# Altium PCB PCB_NEW-Door-Lock-project-Using-ESP32-copy_2026-03-03.pcbdoc
Units mm, origin at the board's own origin, x right, y up, seen from the top; angles counter-clockwise.
Board outline 107.7 x 128.65 mm, 2 copper layers (Top Layer, Bottom Layer); 29 components, 28 nets, 111 pads, 62 vias.
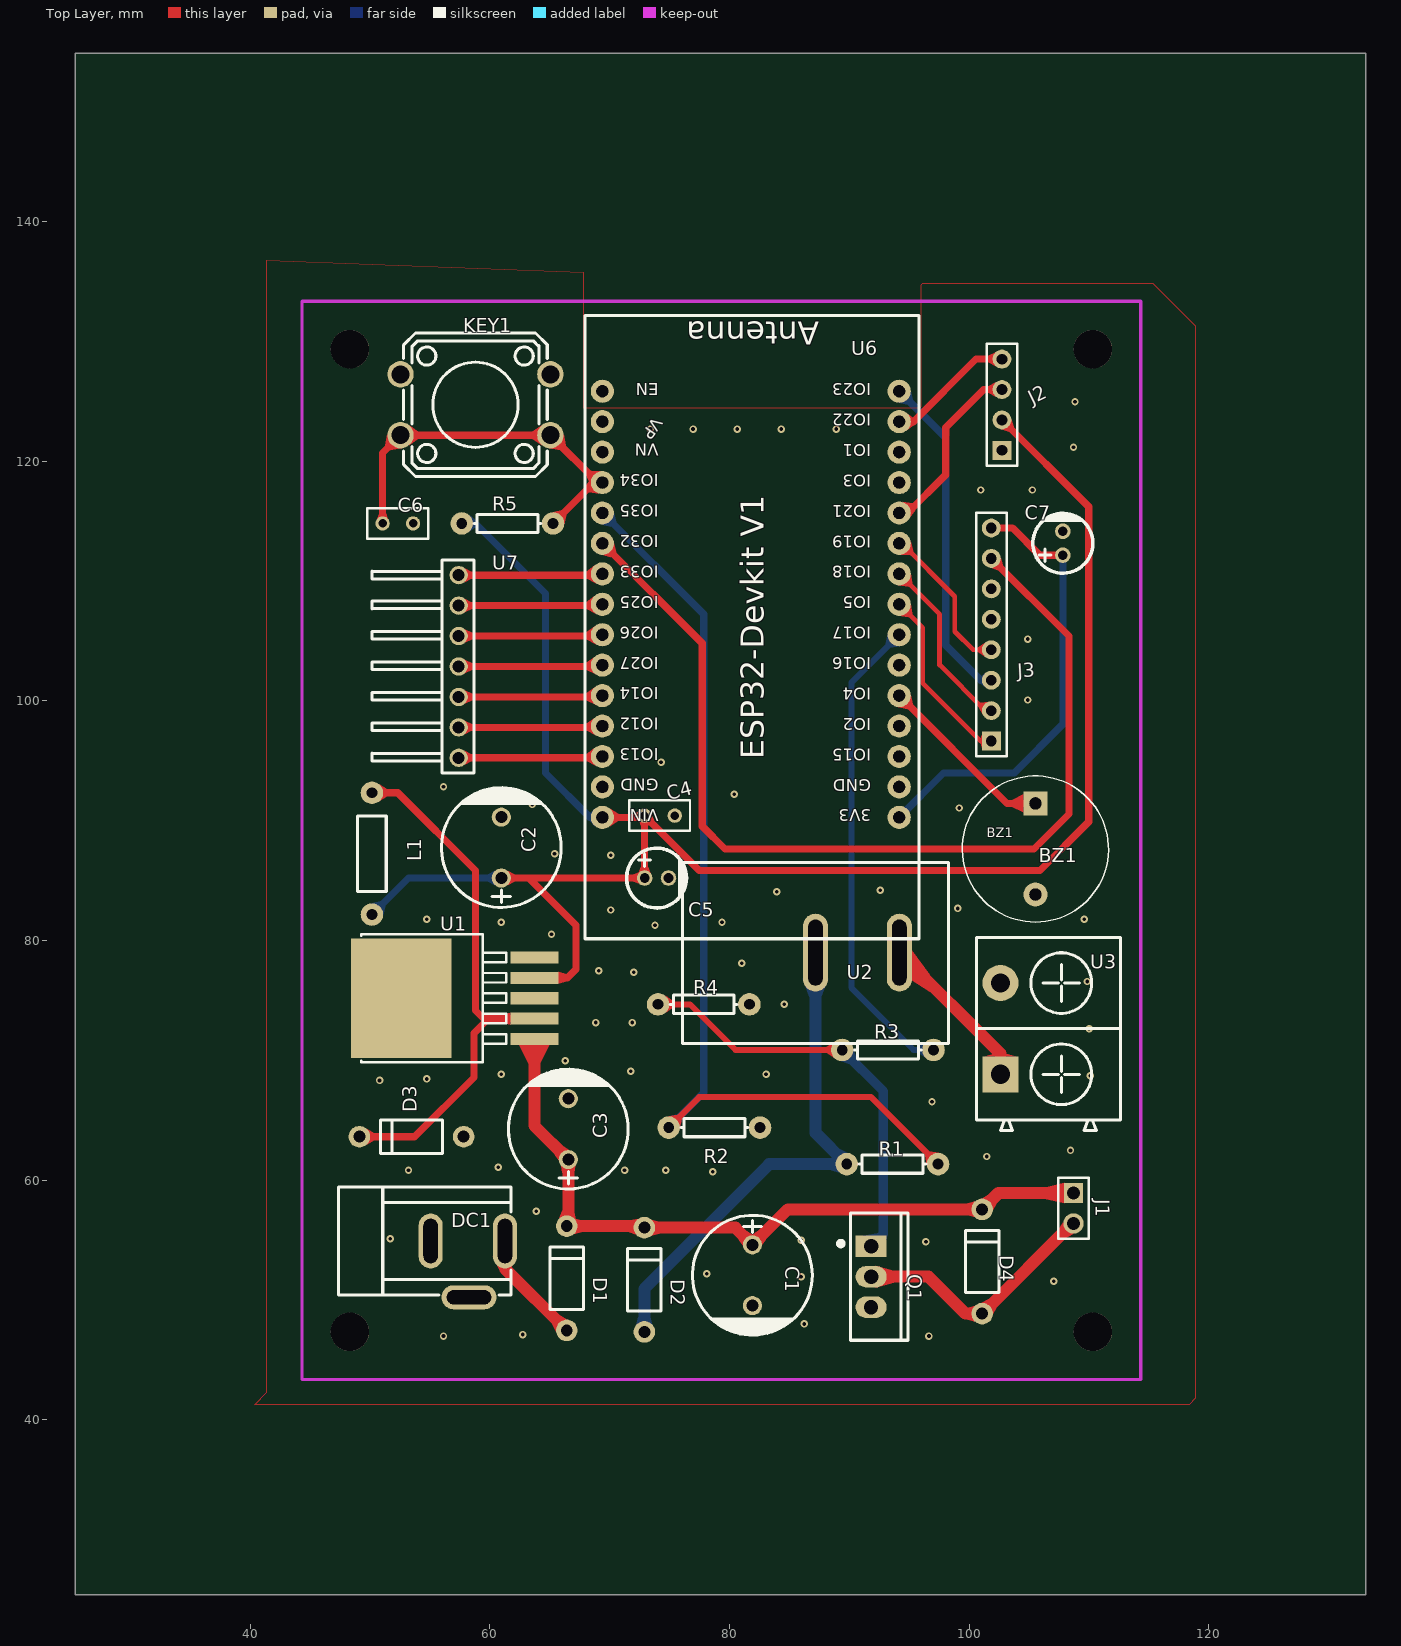
[diagram p0: Top Layer view]
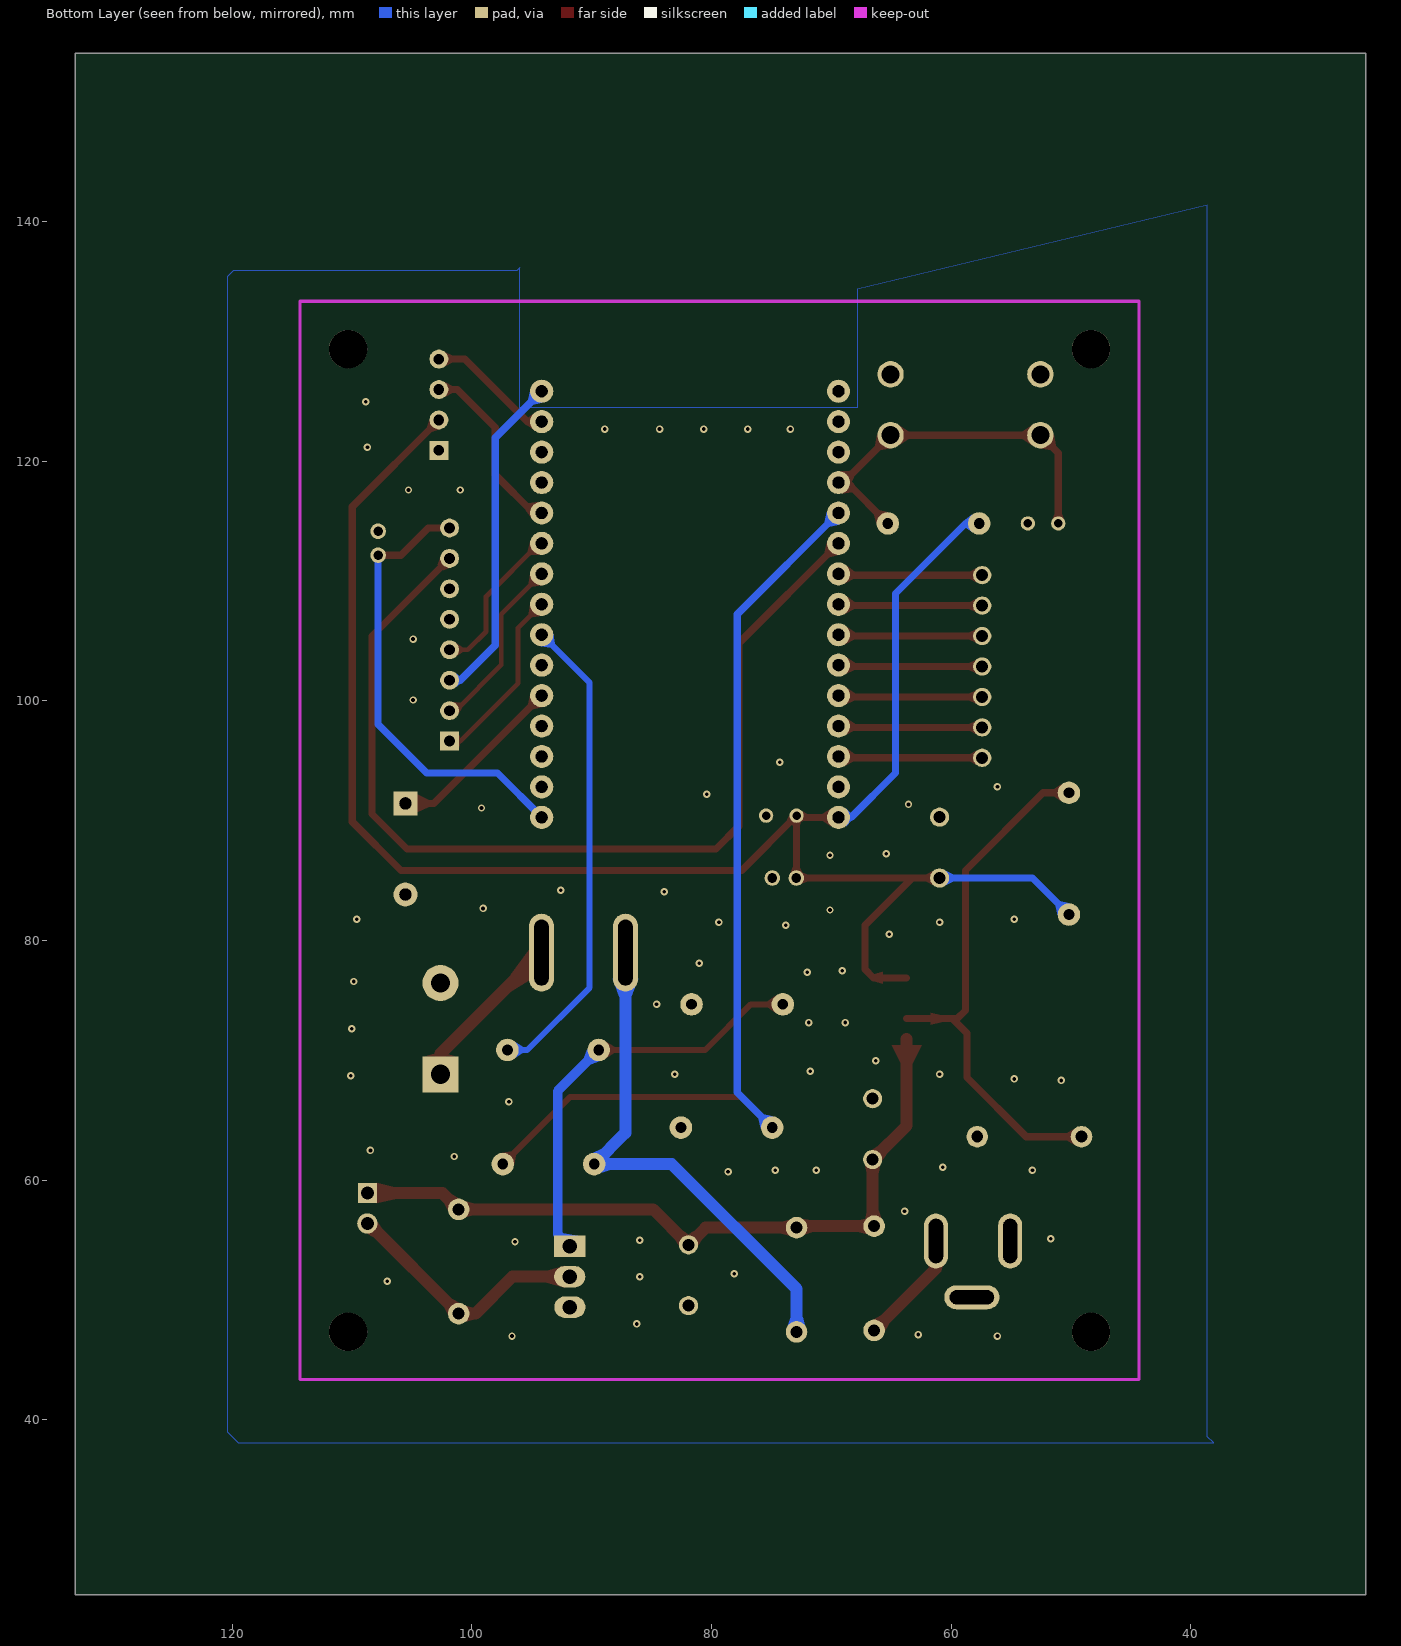
[diagram p1: Bottom Layer view, seen from below]

## Layer stack, top to bottom
Top Layer: signal copper (thickness not stored)
Dielectric: dielectric 0.32, FR-4, Dk 4.8
Bottom Layer: signal copper (thickness not stored)

## Board outline
133.096,25.4 25.4,25.4 25.4,154.051 133.096,154.051

## Components (designator, comment, footprint, x,y, rotation, side; value= is the part's Value field where it differs from the comment)
BZ1 "DEVICE_BUZZER" BUZZER_BEEPER:BUZZER_12X9.5RM7.6 105.537,91.44 r270 top
C1 "1000uF" CAP-TH_BD10.0-P5.00-D1.0-FD 81.915,52.07 r270 top
C2 "220uF" CAP-TH_BD10.0-P5.00-D1.0-FD 60.96,87.757 r90 top
C3 "220uF" CAP-TH_BD10.0-P5.00-D1.0-FD 66.548,64.262 r90 top
C4 "0.1u" RAD-0.1 74.168,90.424 r0 top
C5 "10uF" CAP-TH_BD5.0-P2.00-D0.8-FD-10UF50VC110GL 73.914,85.217 r0 top
C6 "0.1u" RAD-0.1 52.324,114.808 r180 top
C7 "10uF" CAP-TH_BD5.0-P2.00-D0.8-FD-10UF50VC110GL 107.823,113.157 r90 top
D1 "1N5822" DO-41_BD2.4-L4.7-P8.70-D0.9-RD 66.421,51.816 r270 top
D2 "1N5822" DO-41_BD2.4-L4.7-P8.70-D0.9-RD 72.898,51.689 r270 top
D3 "1N5822" DO-41_BD2.4-L4.7-P8.70-D0.9-RD 53.467,63.627 r0 top
D4 "1N5822" DO-41_BD2.4-L4.7-P8.70-D0.9-RD 101.092,53.213 r270 top
DC1 "jack dc" DC-IN-TH_DC005 58.166,52.578 r0 top
J1 "HDR-M-2.54_1x2" HDR-M-2.54_1X2 108.712,57.658 r270 top
J2 "lcd" HDR-M-2.54_1X4 102.743,124.714 r90 top
J3 "rfid" HDR-M-2.54_1X8 101.854,106.807 r90 top
KEY1 "K4-12×12_TH" KEY-TH_4P-L12.0-W12.0-P5.00-LS12.5 58.801,124.714 r180 top
L1 "33uH" L_AXIAL-0.4 50.165,87.249 r270 top
Q1 "IRLZ44NPBF-VB" TO-220-3_L10.0-W4.5-P2.54-L-2 91.821,51.943 r270 top
R1 "10k" R_AXIAL-0.3 93.599,61.341 r0 top
R2 "2.7k" R_AXIAL-0.3 78.74,64.389 r0 top
R3 "470" R_AXIAL-0.3 93.218,70.866 r180 top
R4 "10k" R_AXIAL-0.3 77.851,74.676 r0 top
R5 "10k" R_AXIAL-0.3 61.468,114.808 r0 top
U1 "LM2596SX-5.0-JSM" TO-263-5_L10.0-W8.4-P1.70-LS15.3-BR 58.166,75.184 r0 top
U2 "HX KCD1-2P-P" SW-TH_L22.2-W15.0-P7.00_KCD1-2P-P 90.678,78.994 r180 top
U3 "KF7.62-2P_C5173665" CONN-TH_2P-P7.62_KEFA_KF7.62-2P 102.616,72.644 r90 top
U6 "ESP32-DEVKIT-V1-30PIN" ESP32-DEVKITV1_ESP32-DEVKITV1 88.9,108.712 r0 top
U7 "keypad" CONN-TH_PZ2.54-1X7P-ZW 57.404,102.87 r270 top

## Footprints (in the part's own frame and the unit in brackets; to place one, negate y for a bottom-side part, rotate by r counter-clockwise, add the part's x,y. Pads: shape width x height; smd on the part's side, far side on the other; paste and mask are expansions set on the pad)
BUZZER_BEEPER:BUZZER_12X9.5RM7.6 [mm]
  rect 2x2 hole 1 slot 1.005 at 0 deg paste+0 mask+0.051: 1(0,0)
  round 2 hole 1 slot 1.005 at 0 deg paste+0 mask+0.051: 2(7.6,0)
  silkscreen extent -2.3,-6.1 9.9,6.1
CAP-TH_BD5.0-P2.00-D0.8-FD-10UF50VC110GL [mm]
  round 1.3 hole 0.8 paste+0 mask+0.051: 1(-1,0) 2(1,0)
  silkscreen extent -2.5,-2.5 2.5,2.5
CAP-TH_BD10.0-P5.00-D1.0-FD [mm]
  round 1.6 hole 1 paste+0 mask+0.051: 1(-2.54,0) 2(2.54,0)
  silkscreen extent -5,-5 5.08,5
CONN-TH_2P-P7.62_KEFA_KF7.62-2P [mm]
  rect 3x3 hole 1.6 paste+0 mask+0.051: 1(-3.81,0)
  round 3 hole 1.6 paste+0 mask+0.051: 2(3.81,0)
  silkscreen extent -8.51,-10 7.62,2
CONN-TH_PZ2.54-1X7P-ZW [mil]
  round 60 hole 39.37 paste+0 mask+1.97: 1(-300,0) 2(-200,0) 3(-100,0) 4(0,0) 5(100,0) 6(200,0) 7(300,0)
  silkscreen extent -350,-285 350,50
DC-IN-TH_DC005 [mm]
  oval 2x4.6 hole 1.2 slot 3.7 at 90 deg paste+0 mask+0.051: 1(3.1,2.35) 2(-3.1,2.35)
  oval 4.6x2 hole 1.2 slot 3.7 at 0 deg paste+0 mask+0.051: 3(0.1,-2.35)
  silkscreen extent -10.8,-2.15 3.6,6.85
DO-41_BD2.4-L4.7-P8.70-D0.9-RD [mm]
  round 1.8 hole 1 paste+0 mask+0.051: 1(-4.35,0) 2(4.35,0)
  silkscreen extent -2.6,-1.4 2.6,1.4
ESP32-DEVKITV1_ESP32-DEVKITV1 [mil]
  round 76 hole 39.36 paste+0 mask+2: 3V3(207.32,-725.64) D2(207.32,-425.64) D4(207.32,-325.64) D5(207.32,-25.64) D12(-767.89,-425.64) D13(-767.89,-525.64) D14(-767.89,-325.64) D15(207.32,-525.64) D18(207.32,74.36) D19(207.32,174.36) D21(207.32,274.36) D22(207.32,574.36) D23(207.32,674.36) D25(-767.89,-25.64) D26(-767.89,-125.64) D27(-767.89,-225.64) D32(-767.89,174.36) D33(-767.89,74.36) D34(-767.89,374.36) D35(-767.89,274.36) EN(-767.89,674.36) GND(207.32,-625.64) GND2(-767.89,-625.64) RX0(207.32,374.36) RX2(207.32,-225.64) TX0(207.32,474.36) TX2(207.32,-125.64) VIN(-767.89,-725.64) VN(-767.89,474.36) VP(-767.89,574.36)
  silkscreen extent -826,-1124 273,923
HDR-M-2.54_1X2 [mm]
  rect 1.7x1.575 hole 1.1 paste+0 mask+0.051: 1(-1.27,0)
  round 1.7 hole 1.1 paste+0 mask+0.051: 2(1.27,0)
  silkscreen extent -2.54,-1.27 2.54,1.27
HDR-M-2.54_1X4 [mil]
  rect 62x62 hole 35 paste+0 mask+2: 1(-150,0)
  round 62 hole 35 paste+0 mask+2: 2(-50,0) 3(50,0) 4(150,0)
  silkscreen extent -200,-50 200,50
HDR-M-2.54_1X8 [mil]
  rect 62x62 hole 35 paste+0 mask+2: 1(-400,0)
  round 62 hole 35 paste+0 mask+2: 2(-300,0) 3(-200,0) 4(-100,0) 5(0,0) 6(100,0) 7(200,0) 8(300,0)
  silkscreen extent -450,-50 350,50
KEY-TH_4P-L12.0-W12.0-P5.00-LS12.5 [mm]
  round 2.2 hole 1.5 paste+0 mask+0.051: 1(-6.251,2.54) 2(6.251,2.54) 3(-6.251,-2.54) 4(6.251,-2.54)
  silkscreen extent -5.99,-6 5.99,6
L_AXIAL-0.4 [mil]
  round 74 hole 35.4 paste+0 mask+2: 1(-200,0) 2(200,0)
  silkscreen extent -124,-47 124,47
R_AXIAL-0.3 [mil]
  round 74 hole 35.4 paste+0 mask+2: 1(-150,0) 2(150,0)
  silkscreen extent -110,-30 110,30
RAD-0.1 [mil]
  round 47 hole 28 paste+0 mask+2: 1(-50,0) 2(50,0)
  silkscreen extent -100,-50 100,50
SW-TH_L22.2-W15.0-P7.00_KCD1-2P-P [mm]
  oval 2.1x6.5 hole 1.2 slot 5.5 at 90 deg paste+0 mask+0.051: 1(-3.5,0) 2(3.5,0)
  silkscreen extent -7.6,-7.5 14.6,7.6
TO-220-3_L10.0-W4.5-P2.54-L-2 [mm]
  rect 1.8x2.6 hole 1.2 paste+0 mask+0.051: 1(-2.54,0.005)
  oval 1.8x2.6 hole 1.2 paste+0 mask+0.051: 2(0,0.005) 3(2.54,-0.005)
  silkscreen extent -5.3,-2.73 5.3,3.09
TO-263-5_L10.0-W8.4-P1.70-LS15.3-BR [mm]
  rect 4x1.02 smd paste+0 mask+0.051: 1(5.55,-3.4) 2(5.55,-1.7) 3(5.55,0) 4(5.55,1.7) 5(5.55,3.4)
  rect 8.4x10 smd paste+0 mask+0.051: 6(-5.55,0)
  silkscreen extent -8.91,-5.33 3.2,5.33

## Free pads (board coordinates)
  round 3.2 hole 3.2 unplated paste+0: ""(48.323,47.35) ""(48.323,129.35) ""(110.323,47.35) ""(110.323,129.35)

## Via types
v1: diameter 0.62, hole 0.31, Top Layer to Bottom Layer, tented both sides, 62 vias

## Nets (pads, with @x,y where several pads share a name; then routed paths per layer and width w, separated by ;. In a path a pad name is that pad's centre, name@x,y a point inside that pad or via, vN(x,y) a via of type N, cw(c..) or ccw(c..) an arc to the next point about the centre after c; other vN are vias at no path point)
+3.3V: C7.1 J3.8 U6.3V3 | length 37.9
  Top Layer w0.6: J3.8 103.632,114.427 105.903,112.156 C7.1
  Bottom Layer w0.6: U6.3V3 97.865,93.98 103.759,93.98 107.823,98.044 C7.1
+5V: C2.1 C4.1 C5.1 J2.2 L1.2 R5.1 U1.4 U6.VIN | length 155.9
  Top Layer w0.6: U1.4 66.469,76.883 67.183,77.597 67.183,81.28 63.246,85.217 C2.1 C5.1 72.914,90.408 C4.1 ; U6.VIN 72.755,90.281 C4.1 ; J2.2 109.982,116.205 109.982,89.916 105.918,85.852 77.47,85.852 C4.1
  Bottom Layer w0.6: L1.2 53.213,85.217 C2.1 ; R5.1 58.801,114.808 64.643,108.966 64.643,93.98 68.341,90.282 U6.VIN
+12V: C1.1 C3.1 D1.1 D2.1 D4.1 J1.1 U1.1 | length 61.6
  Top Layer w1: U1.1 63.716,64.554 C3.1 66.548,56.293 D1.1 72.771,56.166 D2.1 ; D2.1 80.485,56.04 C1.1 84.868,57.563 D4.1 ; D4.1 102.456,58.928 J1.1
ADC_PIN_1: R1.2 R2.1 U6.D35 | length 81.8
  Top Layer w0.5: R2.1 77.47,66.929 91.821,66.929 R1.2
  Bottom Layer w0.6: U6.D35 77.851,107.226 77.851,67.31 R2.1
CLK: J3.2 U6.D18 | length 14.9
  Top Layer w0.4: U6.D18 97.536,107.231 97.536,102.997 101.346,99.187 J3.2
CS: J3.1 U6.D5 | length 15.1
  Top Layer w0.4: U6.D5 96.139,106.088 96.139,101.473 100.965,96.647 J3.1
D4: BZ1.1 U6.D4 | length 15.8
  Top Layer w0.254: BZ1.1@105.029,91.948 BZ1.1
  Top Layer w0.6: U6.D4 103.167,91.44 BZ1.1
D4_2: D4.2 J1.2 Q1.2 | length 21.3
  Top Layer w1: Q1.2 96.614,51.943 ; 96.615,51.943 99.695,48.863 D4.2 108.617,56.388 J1.2
D12: U6.D12 U7.6 | length 12
  Top Layer w0.6: U7.6 69.285,97.79 U6.D12
D13: U6.D13 U7.7 | length 12
  Top Layer w0.6: U7.7 69.285,95.25 U6.D13
D14: U6.D14 U7.5 | length 12
  Top Layer w0.6: U7.5 69.285,100.33 U6.D14
D25: U6.D25 U7.2 | length 12
  Top Layer w0.6: U7.2 69.285,107.95 U6.D25
D26: U6.D26 U7.3 | length 12
  Top Layer w0.6: U7.3 69.285,105.41 U6.D26
D27: U6.D27 U7.4 | length 12
  Top Layer w0.6: U7.4 69.285,102.87 U6.D27
D32: J3.7 U6.D32 | length 83.7
  Top Layer w0.6: U6.D32 77.724,104.813 77.724,89.535 79.629,87.63 105.41,87.63 108.331,90.551 108.331,105.41 J3.7
D33: U6.D33 U7.1 | length 12
  Top Layer w0.6: U7.1 69.285,110.49 U6.D33
D34: C6.2 KEY1.1 KEY1.2 R5.2 U6.D34 | length 31.6
  Top Layer w0.6: C6.2 51.054,120.678 KEY1.2 KEY1.1@64.671,122.174 ; KEY1.1 69.004,118.222 U6.D34 68.692,118.222 R5.2
DC1_1: D1.2 DC1.1 | length 9.6
  Top Layer w1: DC1.1 61.265,52.621 D1.2
GND: BZ1.2 C1.2 C2.2 C3.2 C4.2 C5.2 C6.1 C7.2 D3.2 DC1.2 J2.1 J3.6 KEY1.3 KEY1.4 Q1.3 R2.2 R4.2 U1.3 U1.5 U3.2 U6.GND U6.GND2
  other v1: 56.134,46.99 96.647,46.99 62.738,47.117 86.233,48.006 107.061,51.562 85.979,51.943 78.105,52.197 96.393,54.864 85.979,54.991 51.689,55.118 63.881,57.404 78.613,60.706 53.213,60.833 71.247,60.833 74.676,60.833 60.706,61.087 101.473,61.976 108.458,62.484 96.901,66.548 50.8,68.326 54.737,68.453 110.109,68.707 60.96,68.834 83.058,68.834 71.755,69.088 66.294,69.977 110.01,72.644 68.834,73.152 71.882,73.152 84.582,74.676 109.855,76.581 72.009,77.343 69.088,77.47 81.026,78.105 65.151,80.518 73.787,81.28 60.96,81.534 79.375,81.534 54.737,81.788 109.601,81.788 70.104,82.55 99.06,82.677 83.947,84.074 92.583,84.201 70.104,87.122 65.405,87.249 99.187,91.059 63.552,91.361 80.391,92.202 56.134,92.837 74.295,94.869 104.902,100.076 104.902,105.156 100.965,117.602 105.283,117.602 108.712,121.158 73.406,122.682 76.962,122.682 80.645,122.682 84.328,122.682 88.9,122.682 108.839,124.968
R1_1: D2.2 R1.1 U2.2 | length 43.5
  Bottom Layer w1: D2.2 72.898,50.927 83.312,61.341 R1.1 87.178,63.952 U2.2
R3_2: Q1.1 R3.2 R4.1 | length 35.2
  Top Layer w0.5: R4.1 76.708,74.676 80.518,70.866 R3.2
  Bottom Layer w0.8: R3.2 92.837,67.437 92.837,55.494 Q1.1
SCL: J2.4 U6.D22 | length 10.7
  Top Layer w0.6: U6.D22 95.362,123.302 100.584,128.524 J2.4
SDA: J2.3 U6.D21 | length 15.2
  Top Layer w0.6: U6.D21 94.854,115.682 98.044,118.872 98.044,122.809 101.219,125.984 J2.3
SPI_MISO: J3.4 U6.D19 | length 13.1
  Top Layer w0.4: U6.D19 94.376,113.142 98.806,108.712 98.806,105.791 100.33,104.267 J3.4
SPI_MOSI: J3.3 U6.D23 | length 27.8
  Bottom Layer w0.6: U6.D23 98.044,121.963 98.044,104.648 100.965,101.727 J3.3
TX2: R3.1 U6.TX2 | length 40.1
  Bottom Layer w0.5: U6.TX2 90.17,101.526 90.17,76.073 95.377,70.866 R3.1
U1_2: D3.1 L1.1 U1.2 | length 49
  Top Layer w0.6: D3.1 53.721,63.627 58.674,68.58 58.674,72.263 59.896,73.485 U1.2 59.484,73.485 58.801,74.168 58.801,85.852 52.324,92.329 L1.1
U2_1: U2.1 U3.1 | length 13.7
  Top Layer w1: U2.1 102.616,70.556 U3.1
pads on no net: DC1.3 J3.5 U1.6 U6.D2 U6.D15 U6.EN U6.RX0 U6.RX2 U6.TX0 U6.VN U6.VP

## Polygon pours and split planes (outlines as drawn)
GND on Bottom Layer (solid): 67.818,134.366 67.818,124.46 96.012,124.46 96.012,136.144 96.266,135.89 119.888,135.89 120.396,135.382 120.396,38.989 119.507,38.1 38.1,38.1 38.608,38.608 38.608,141.351
GND on Top Layer (solid): 67.818,135.763 67.818,124.46 95.885,124.46 96.012,124.587 96.012,134.747 96.139,134.874 115.316,134.874 118.872,131.318 118.872,41.783 118.364,41.275 40.386,41.275 41.402,42.291 41.402,136.779

## Other copper
Top Layer:
  region net U2_1: 95.228,79.194 95.223,76.694 96.728,75.737 96.728,77.151
  region net D4_2: 92.226,51.043 92.226,52.843 93.726,52.443 93.726,51.443
  region net DC1_1: 62.266,53.628 60.266,53.628 60.766,52.621 61.766,52.621
  region net U2_1: 101.366,70.334 103.866,70.334 103.116,70.556 102.116,70.556
  region net +5V: 65.716,77.394 65.716,76.374 66.47,76.584 66.47,77.184
  region net U1_2: 61.716,72.974 61.716,73.994 60.816,73.784 60.816,73.184
  region net U1_2: 61.716,72.974 61.716,73.994 60.816,73.784 60.816,73.184
  region net +12V: 64.966,71.274 62.466,71.274 63.216,69.774 64.216,69.774
  region net CS: 101.067,96.147 101.067,97.147 100.965,96.847 100.965,96.447
  region net +12V: 107.925,58.078 107.925,59.778 106.425,59.428 106.425,58.428
  region net D4: 104.537,90.69 104.537,92.19 103.637,91.74 103.637,91.14
  region net D13: 57.908,94.678 57.908,95.822 58.441,95.55 58.441,94.95
  region net D12: 57.908,97.218 57.908,98.361 58.441,98.09 58.441,97.49
  region net D14: 57.908,99.758 57.908,100.901 58.441,100.63 58.441,100.03
  region net D27: 57.908,102.298 57.908,103.441 58.441,103.17 58.441,102.57
  region net D26: 57.908,104.838 57.908,105.981 58.441,105.71 58.441,105.11
  region net D25: 57.908,107.379 57.908,108.521 58.441,108.25 58.441,107.65
  region net D33: 57.908,109.918 57.908,111.061 58.441,110.79 58.441,110.19
  region net +5V: 70.034,89.557 70.034,91.005 70.71,90.581 70.71,89.981
  region net D13: 68.821,94.586 68.699,96.028 68.061,95.55 68.112,94.95
  region net D12: 68.821,97.126 68.699,98.568 68.061,98.09 68.112,97.49
  region net D14: 68.821,99.666 68.699,101.108 68.061,100.63 68.112,100.03
  region net D27: 68.821,102.206 68.699,103.648 68.061,103.17 68.112,102.57
  region net D26: 68.821,104.746 68.699,106.188 68.061,105.71 68.112,105.11
  region net D25: 68.821,107.286 68.699,108.728 68.061,108.25 68.112,107.65
  region net D33: 68.821,109.826 68.699,111.268 68.061,110.79 68.112,110.19
  region net D32: 69.336,112.177 70.359,113.201 70.537,112.424 70.113,112
  region net D34: 69.086,117.307 68.527,118.642 68.058,118.013 68.309,117.414
  region net D34: 69.252,119.175 68.467,117.959 68.126,118.676 68.459,119.192
  region net SCL: 94.804,122.577 94.804,124.025 95.361,123.601 95.361,123.001
  region net SDA: 95.039,115.269 94.466,116.598 95.245,116.497 95.5,115.904
  region net SPI_MISO: 95.116,113.31 94.215,112.177 95.069,112.166 95.32,112.481
  region net CLK: 94.105,109.637 95.129,110.661 95.237,109.813 94.954,109.53
  region net CS: 94.105,107.097 95.129,108.121 95.237,107.273 94.954,106.99
  region net D4: 94.105,99.477 95.129,100.501 95.307,99.724 94.883,99.299
  region net D34: 65.219,115.746 66.216,114.749 66.395,115.501 65.971,115.925
  region net D4_2: 100.497,48.188 100.497,49.538 99.867,49.363 99.867,48.363
  region net D4_2: 101.036,49.761 101.99,48.807 102.312,49.376 101.605,50.083
  region net +12V: 101.036,58.461 101.99,57.507 102.312,58.076 101.605,58.783
  region net +12V: 100.497,56.888 100.497,58.238 99.867,58.063 99.867,57.063
  region net D34: 51.502,115.203 50.606,115.203 50.754,115.621 51.354,115.621
  region net +5V: 73.401,85.647 72.426,85.647 72.614,86.102 73.214,86.102
  region net +5V: 72.484,84.73 72.484,85.704 72.029,85.517 72.029,84.917
  region net +5V: 72.588,89.914 72.43,90.795 72.044,90.581 72.152,89.981
  region net +5V: 73.353,90.038 72.458,90.02 72.614,89.606 73.214,89.617
  region net +5V: 72.861,89.828 73.494,90.461 73.685,90.062 73.26,89.637
  region net +12V: 65.75,61.672 66.598,62.52 66.131,62.846 65.424,62.139
  region net +12V: 67.148,61.193 65.948,61.193 66.048,60.633 67.048,60.633
  region net U1_2: 50.787,91.624 50.787,93.034 51.444,92.629 51.444,92.029
  region net ADC_PIN_1: 74.871,65.327 75.868,64.33 76.012,65.117 75.658,65.471
  region net ADC_PIN_1: 96.471,61.282 97.468,62.279 96.681,62.423 96.327,62.069
  region net D34: 53.278,121.349 53.278,122.999 54.048,122.474 54.048,121.874
  region net D34: 52.619,121.076 51.452,122.243 51.279,121.327 51.703,120.903
  region net D34: 64.324,121.349 64.324,122.999 63.554,122.474 63.554,121.874
  region net D34: 66.15,122.243 64.983,121.076 65.899,120.903 66.323,121.327
  region net D32: 101.805,111.101 102.64,111.936 102.824,111.341 102.4,110.917
  region net SPI_MISO: 101.333,103.676 101.333,104.858 100.782,104.467 100.782,104.067
  region net CLK: 101.637,99.944 101.13,98.877 100.795,99.455 100.977,99.839
  region net SCL: 102.222,127.933 102.222,129.115 101.671,128.824 101.671,128.224
  region net SDA: 102.222,125.393 102.222,126.575 101.671,126.284 101.671,125.684
  region net +5V: 102.694,122.658 103.529,123.493 103.713,122.898 103.289,122.474
  region net D4_2: 107.868,56.49 108.716,55.538 108.181,55.244 107.515,55.993
  region net R3_2: 74.663,73.971 74.663,75.381 75.32,74.926 75.32,74.426
  region net R3_2: 88.786,70.161 88.786,71.571 88.129,71.116 88.129,70.616
  region net +12V: 81.117,54.56 81.965,55.408 81.498,55.734 80.791,55.027
  region net +12V: 81.865,55.408 82.713,54.56 83.039,55.027 82.332,55.734
  region net U1_2: 49.712,62.952 49.712,64.302 50.342,63.927 50.342,63.327
  region net +12V: 72.376,56.772 72.236,55.429 71.627,55.666 71.731,56.666
  region net +12V: 73.493,55.364 73.493,56.714 74.123,56.539 74.123,55.539
  region net DC1_1: 65.523,47.41 66.477,48.364 65.908,48.686 65.201,47.979
  region net +12V: 67.016,55.491 67.016,56.841 67.646,56.666 67.646,55.666
  region net +12V: 65.811,56.828 67.154,56.688 67.048,57.333 66.048,57.437
  region net +5V: 61.489,84.617 61.489,85.817 62.049,85.517 62.049,84.917
  region net +5V: 61.489,84.617 61.489,85.817 62.049,85.517 62.049,84.917
Bottom Layer:
  region net R1_1: 88.228,76.794 86.128,76.794 86.678,75.294 87.678,75.294
  region net R3_2: 91.155,55.383 93.126,55.045 93.12,55.211 92.354,55.577
  region net +5V: 68.757,89.557 68.757,91.005 68.342,90.581 68.342,89.981
  region net ADC_PIN_1: 69.335,114.717 70.359,115.741 70.537,114.964 70.113,114.539
  region net SPI_MOSI: 94.105,124.877 95.129,125.901 95.307,125.124 94.883,124.699
  region net TX2: 93.203,105.582 94.226,104.557 93.413,104.415 93.059,104.769
  region net +5V: 58.28,114.103 58.28,115.513 58.801,115.108 58.801,114.508
  region net +5V: 50.106,83.107 51.103,82.11 51.282,82.862 50.858,83.286
  region net ADC_PIN_1: 74.871,65.327 75.868,64.33 76.047,65.082 75.623,65.506
  region net R1_1: 89.167,60.636 89.167,62.046 88.51,61.841 88.51,60.841
  region net R1_1: 88.851,61.282 89.848,62.279 89.238,62.599 88.531,61.892
  region net SPI_MOSI: 101.333,101.136 101.333,102.318 100.965,102.027 100.965,101.427
  region net R3_2: 89.349,69.928 90.346,70.925 90.596,70.244 90.03,69.678
  region net TX2: 96.406,70.161 96.406,71.571 95.749,71.116 95.749,70.616
  region net R1_1: 73.573,47.934 72.223,47.934 72.398,48.564 73.398,48.564
  region net +5V: 60.431,84.617 60.431,85.817 59.871,85.517 59.871,84.917

## Text inside footprints (layer, text, board x,y; h text height)
BZ1: Mechanical 1 "Buzzer" at 98.137,87.64 h1 r270
U6: Document "ESP32-DEVKITV1" at 86.741,111.379 h1.27 r90; Top Overlay "3V3" at 91.826,90.941 h1.02 r180; Top Overlay "GND" at 91.826,93.481 h1.02 r180; Top Overlay "IO15" at 91.826,96.021 h1.02 r180; Top Overlay "IO2" at 91.826,98.561 h1.02 r180; Top Overlay "IO4" at 91.826,101.101 h1.02 r180; Top Overlay "IO16" at 91.826,103.641 h1.02 r180; Top Overlay "IO17" at 91.826,106.181 h1.02 r180; Top Overlay "IO5" at 91.826,108.721 h1.02 r180; Top Overlay "IO18" at 91.826,111.261 h1.02 r180; Top Overlay "IO19" at 91.826,113.801 h1.02 r180; Top Overlay "IO21" at 91.826,116.341 h1.02 r180; Top Overlay "IO3" at 91.826,118.881 h1.02 r180; Top Overlay "IO1" at 91.826,121.421 h1.02 r180; Top Overlay "IO22" at 91.826,123.961 h1.02 r180; Top Overlay "IO23" at 91.826,126.501 h1.02 r180; Top Overlay "VIN" at 74.106,90.961 h1.02 r180; Top Overlay "GND" at 74.106,93.501 h1.02 r180; Top Overlay "IO13" at 74.106,96.041 h1.02 r180; Top Overlay "IO12" at 74.106,98.581 h1.02 r180; Top Overlay "IO14" at 74.106,101.121 h1.02 r180; Top Overlay "IO27" at 74.106,103.661 h1.02 r180; Top Overlay "IO26" at 74.106,106.201 h1.02 r180; Top Overlay "IO25" at 74.106,108.741 h1.02 r180; Top Overlay "IO33" at 74.106,111.281 h1.02 r180; Top Overlay "IO32" at 74.106,113.821 h1.02 r180; Top Overlay "IO35" at 74.106,116.361 h1.02 r180; Top Overlay "IO34" at 74.106,118.901 h1.02 r180; Top Overlay "VN" at 74.106,121.441 h1.02 r180; Top Overlay "VP" at 73.69,123.764 h1.02 r235; Top Overlay "EN" at 74.106,126.521 h1.02 r180; Top Overlay "ESP32-Devkit V1" at 82.861,95.117 h1.93 r90; Top Overlay "Antenna" at 87.484,131.642 h1.93 r180